# Altium PCB PCB1.PcbDoc
Units mm, origin at the board's own origin, x right, y up, seen from the top; angles counter-clockwise.
Board outline 150 x 130 mm, 2 copper layers (Top Layer, Bottom Layer); 49 components, 51 nets, 208 pads, 22 vias.
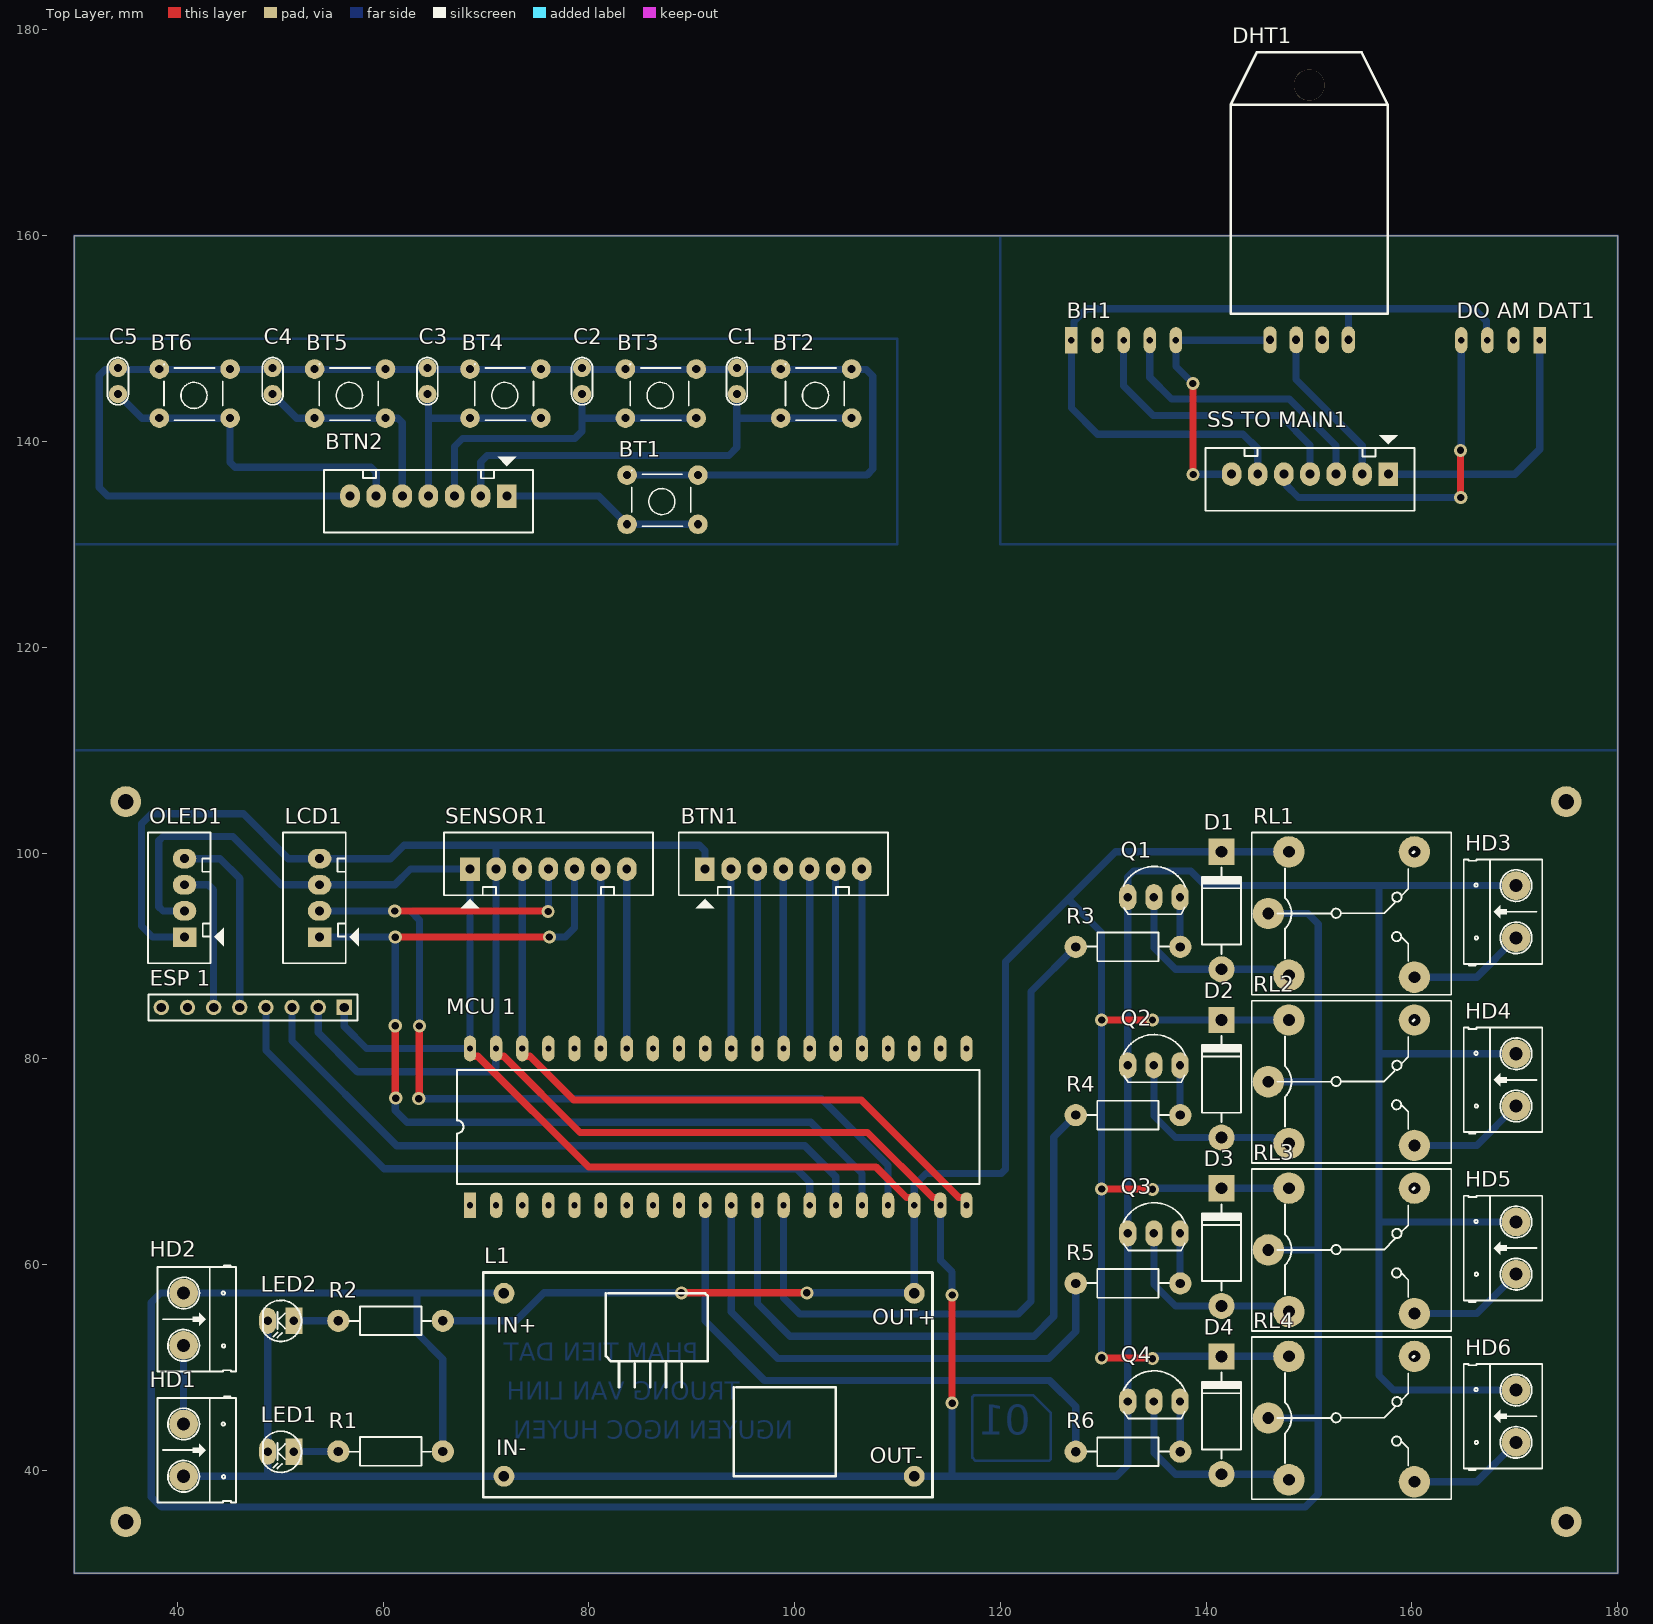
[diagram p0: Top Layer view]
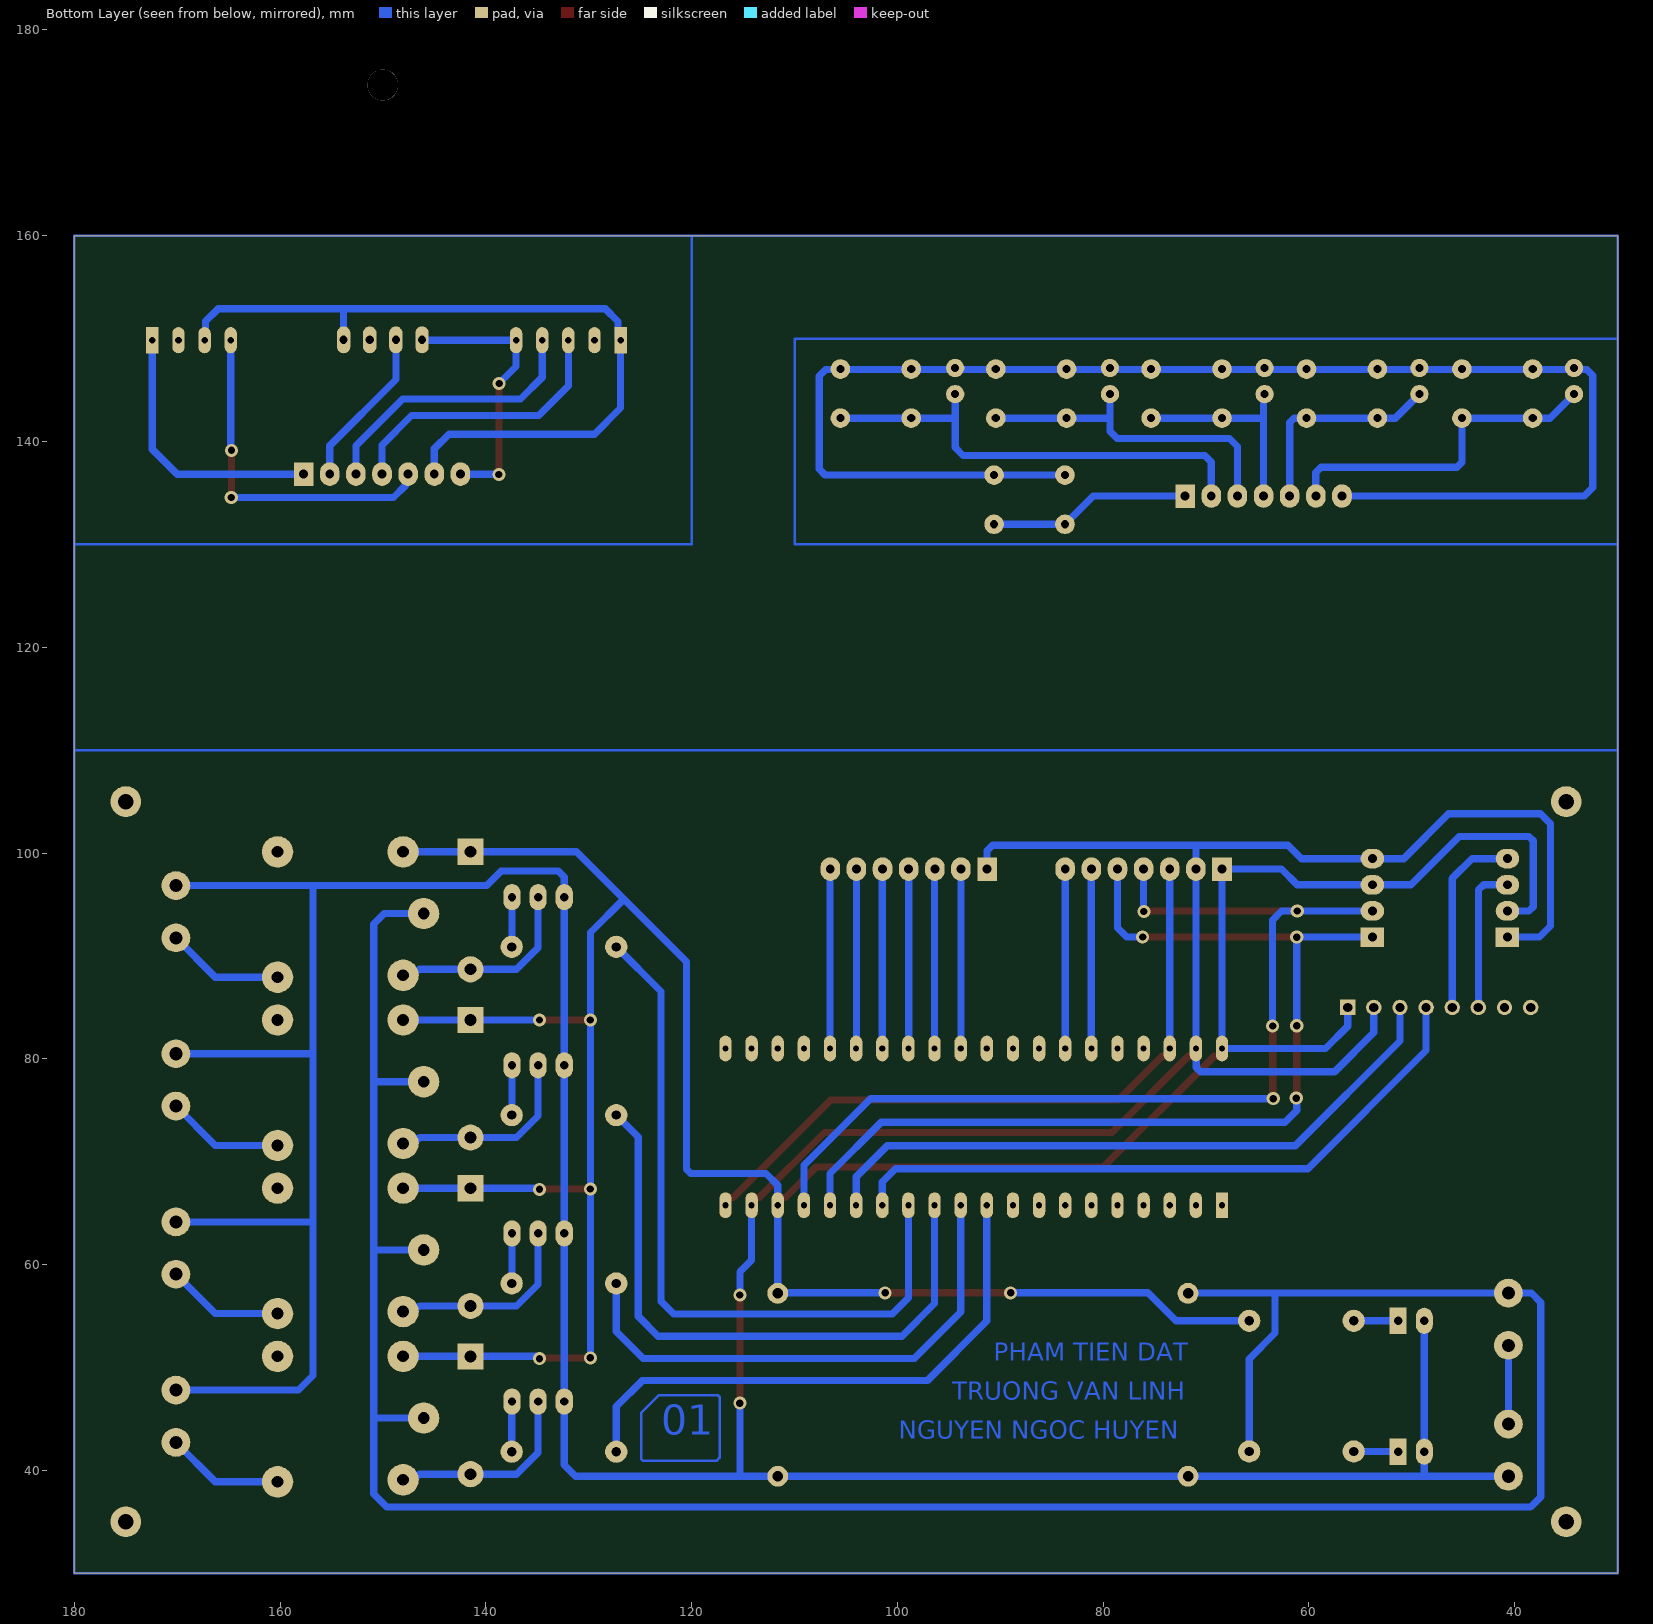
[diagram p1: Bottom Layer view, seen from below]
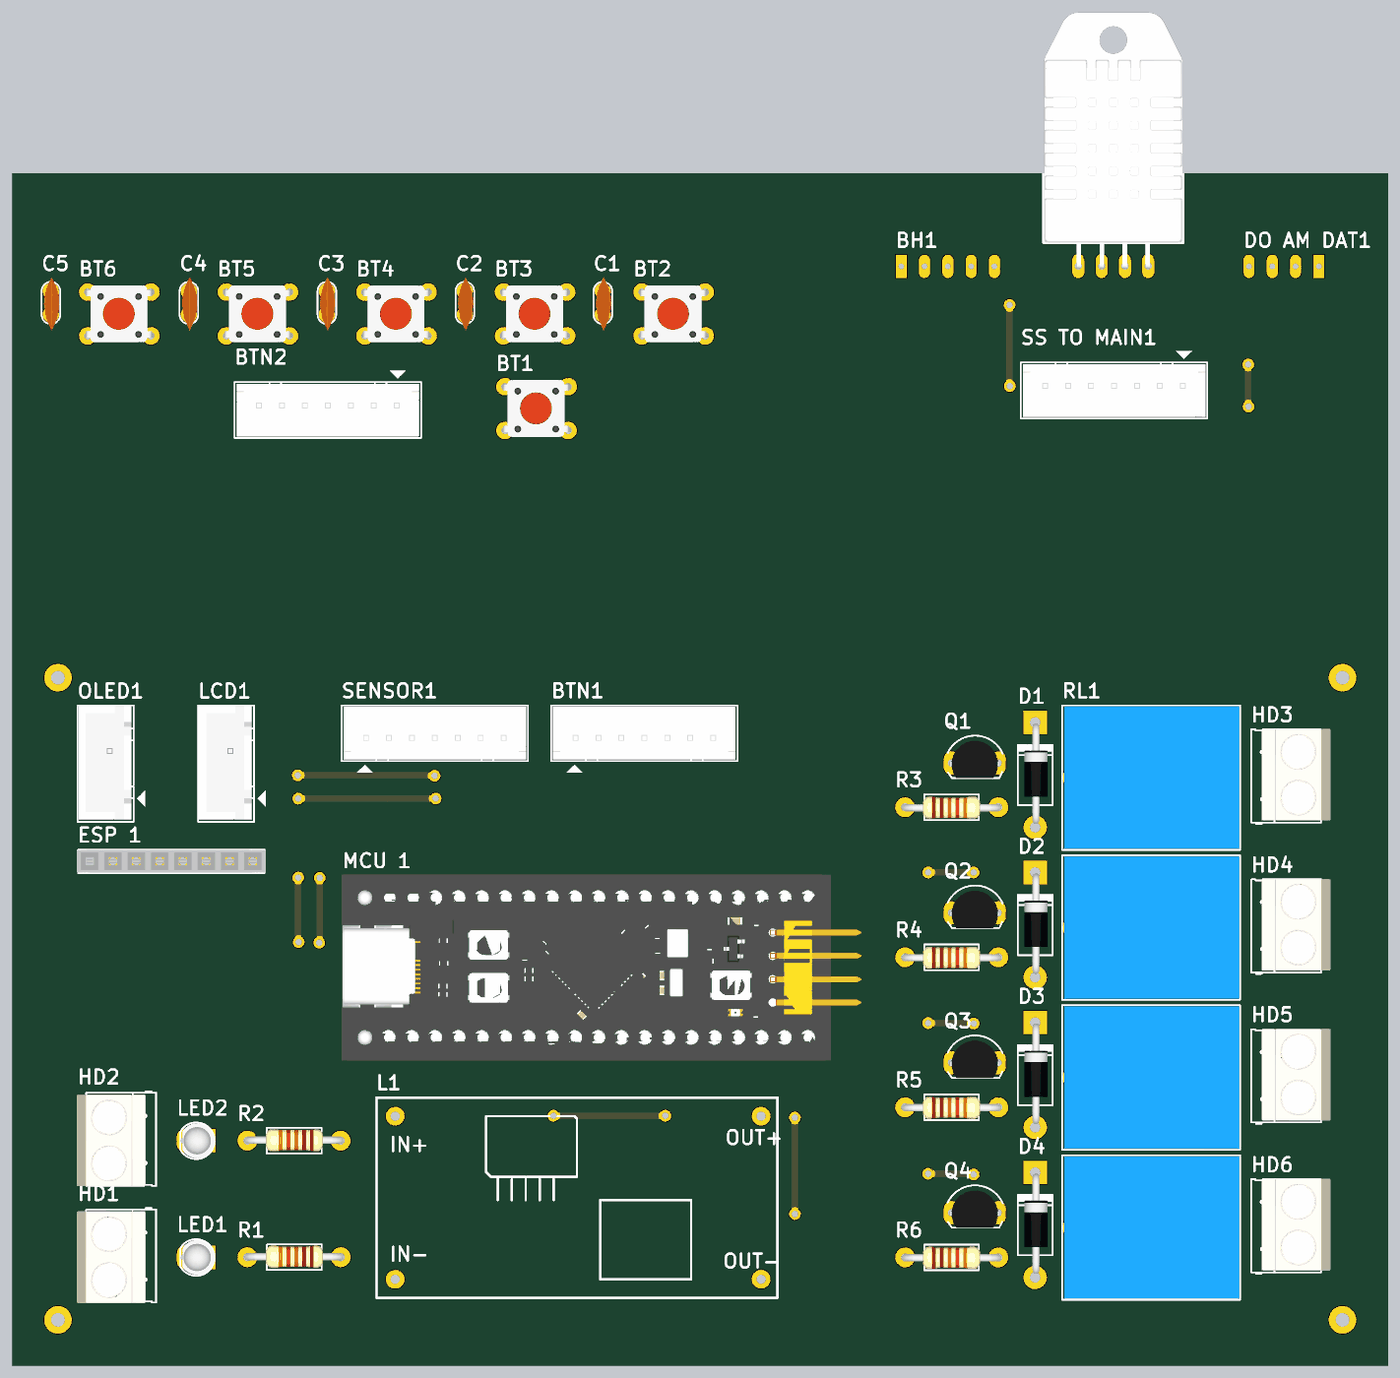
[diagram p2: 3D render of the assembled board from above, using the file's embedded part models]

## Layer stack, top to bottom
Top Solder: solder mask 0.0102, Solder Resist, Dk 3.5
Top Layer: signal copper 0.0356
Dielectric 1: dielectric 0.32, FR-4, Dk 4.8
Bottom Layer: signal copper 0.0356
Bottom Solder: solder mask 0.0102, Solder Resist, Dk 3.5

## Board outline
30,30 30,160 180,160 180,30

## Design rules (kind name [scope] priority, off if disabled: settings)
Clearance [All] p1: gap=0.3 ignorepadtopadclearanceinfootprint=FALSE
PolygonConnect [All] p1: connectstyle=Relief reliefconductorwidth=0.254 reliefentries=4 polygonreliefangle="90 Angle" airgapwidth=0.254
RoutingVias [All] p1: holewidth=0.711 width=1.27 viastyle="Through Hole" minholewidth=0.711 minwidth=1.27 maxholewidth=0.711 maxwidth=1.27
SolderMaskExpansion [All] p1: expansion=0.102 istentingtop=FALSE
Width [All] p1: maxlimit=0.7 minlimit=0.5 preferedwidth=0.7
30 further rules are at their usual default settings.

## Classes and differential pairs
component class Sheet1: BTN1 D1 D2 D3 D4 "ESP 1" HD1 HD2 HD3 HD4 HD5 HD6 L1 LCD1 LED1 LED2 "MCU 1" OLED1 Q1 Q2 Q3 Q4 R5 R6 RL1 RL2 RL3 RL4 SENSOR1

## Components (designator, comment, footprint, x,y, rotation, side; value= is the part's Value field where it differs from the comment)
BH1 "BH1750" BH1750 126.906,149.842 r90 top
BT1 "BT" SW4 90.272,131.75 r180 top
BT2 "BT" SW4 105.212,142.062 r180 top
BT3 "BT" SW4 90.111,142.062 r180 top
BT4 "BT" SW4 75.009,142.062 r180 top
BT5 "BT" SW4 59.907,142.062 r180 top
BT6 "BT" SW4 44.806,142.062 r180 top
BTN1 "JP7" CON7 91.288,98.436 r0 top value="Connector 7"
BTN2 "JP7" CON7 72.034,134.696 r180 top value="Connector 7"
C1 "CAP gom" CN1 94.386,147.142 r270 top
C2 "CAP gom" CN1 79.348,147.142 r270 top
C3 "CAP gom" CN1 64.31,147.142 r270 top
C4 "CAP gom" CN1 49.272,147.142 r270 top
C5 "CAP gom" CN1 34.234,147.142 r270 top
D1 "1N4007" D2A 141.503,100.127 r270 top
D2 "1N4007" D2A 141.503,83.769 r270 top
D3 "1N4007" D2A 141.503,67.412 r270 top
D4 "1N4007" D2A 141.503,51.054 r270 top
DHT1 "DHT22" DHT22 150.02,149.88 r0 top
"DO AM DAT1" "Cam_bien_do_am_dat" "Am dat" 172.423,149.842 r270 top
"ESP 1" "JP8" HDR1X8 56.236,84.988 r180 top value="Connector 8"
HD1 "Header 2" HED2 40.617,44.501 r270 top
HD2 "Header 2" HED2 40.617,57.226 r270 top
HD3 "Header 2" HED2 170.129,91.754 r90 top
HD4 "Header 2" HED2 170.129,75.408 r90 top
HD5 "Header 2" HED2 170.129,59.062 r90 top
HD6 "Header 2" HED2 170.129,42.715 r90 top
L1 "BUCK_LM2596" BUCK_LM2596 91.313,49.073 r0 top
LCD1 "JP4" CON4 53.833,91.832 r90 top value="Connector 4"
LED1 "LED" LED-3 51.333,41.808 r180 top value="LED 3 ly Single Colour"
LED2 "LED" LED-3 51.333,54.534 r180 top value="LED 3 ly Single Colour"
"MCU 1" "KIT STM32F401" "KIT STM32F401" 68.453,65.761 r90 top
OLED1 "JP4" CON4 40.705,91.832 r90 top value="Connector 4"
Q1 "C1815" QTO-92 134.925,95.707 r0 top
Q2 "C1815" QTO-92 134.925,79.367 r0 top
Q3 "C1815" QTO-92 134.925,63.026 r0 top
Q4 "C1815" QTO-92 134.925,46.685 r0 top
R1 "1k" R1/2W 55.651,41.834 r0 top value="R1/4W - 1K"
R2 "1k" R1/2W 55.651,54.534 r0 top value="R1/4W - 1K"
R3 "1k" R1/2W 137.49,90.881 r180 top value="R1/4W - 1K"
R4 "1k" R1/2W 137.49,74.524 r180 top value="R1/4W - 1K"
R5 "1k" R1/2W 137.49,58.166 r180 top value="R1/4W - 1K"
R6 "1k" R1/2W 137.49,41.808 r180 top value="R1/4W - 1K"
RL1 "Relay" RL_SPDT_10A 146.049,94.118 r0 top value="Relay SPDT, 10A, 12V"
RL2 "Relay" RL_SPDT_10A 146.049,77.772 r0 top value="Relay SPDT, 10A, 12V"
RL3 "Relay" RL_SPDT_10A 146.049,61.426 r0 top value="Relay SPDT, 10A, 12V"
RL4 "Relay" RL_SPDT_10A 146.049,45.079 r0 top value="Relay SPDT, 10A, 12V"
SENSOR1 "JP7" CON7 68.453,98.436 r0 top value="Connector 7"
"SS TO MAIN1" "" CON7 157.716,136.825 r180 top value="Connector 7"

## Footprints (in the part's own frame and the unit in brackets; to place one, negate y for a bottom-side part, rotate by r counter-clockwise, add the part's x,y. Pads: shape width x height; smd on the part's side, far side on the other; paste and mask are expansions set on the pad)
"Am dat" [mm]
  rect 2.54x1.2 hole 0.64: 1(0,0)
  oval 2.54x1.2 hole 0.64: 2(0,-2.54) 3(0,-5.08) 4(0,-7.62)
BH1750 [mm]
  rect 2.54x1.2 hole 0.64: 1(0,0)
  oval 2.54x1.2 hole 0.64: 2(0,-2.54) 3(0,-5.08) 4(0,-7.62) 5(0,-10.16)
BUCK_LM2596 [mil]
  round 80 hole 40: 1(-770,320) 2(-770,-380) 3(800,-380) 4(800,320)
  silkscreen extent -850,-460 870,400
CN1 [mil]
  round 70 hole 31: 1(0,0) 2(100,0)
  silkscreen extent -40,-40 141,40, body extent -60,-30 170,37, height 265
CON4 [mil]
  rect 75x90 hole 34: 1(0,0)
  oval 75x90 hole 34: 2(100,0) 3(200,0) 4(300,0)
  silkscreen extent -100,-150 400,140, body extent -90,-90 398,136, height 276
CON7 [mil] "CON7"
  rect 75x90 hole 34: 1(0,0)
  oval 75x90 hole 34: 2(100,0) 3(200,0) 4(300,0) 5(400,0) 6(500,0) 7(600,0)
  silkscreen extent -100,-150 700,140, body extent -92,-92 692,134, height 276
D2A [mil] "Diode 2A, W 150mil, L 450mil"
  round 100 hole 45: 1(450,0)
  rect 100x100 hole 45: 2(0,0)
  silkscreen extent 61,-75 391,75, body extent 5,-47 435,54, height 100
DHT22 [mm]
  oval 1.308x2.616 hole 0.8: DATA(-1.27,0) GND(3.81,0) NC(1.27,0) VDD(-3.81,0)
  round 3 hole 3 unplated: ""(0,24.765)
  silkscreen extent -7.62,2.54 7.62,27.94, body extent -7.55,-0.25 7.55,27.64, height 7.7
HDR1X8 [mm] "Connector; Header; 8 Position"
  rect 1.5x1.5 hole 0.9: 1(0,0)
  round 1.5 hole 0.9: 2(2.54,0) 3(5.08,0) 4(7.62,0) 5(10.16,0) 6(12.7,0) 7(15.24,0) 8(17.78,0)
  silkscreen extent -1.27,-1.27 19.05,1.27, body extent -1.4,-1.26 19.18,1.24, height 7.92
HED2 [mil] "Header 2, 2 pin, hight 300mil, Pin to Pin 200, Colour Green"
  round 110 hole 50: 1(0,0) 2(200,0)
  silkscreen extent -106,-100 300,200, body extent -92,-140 302,155, height 394
"KIT STM32F401" [mm]
  rect 2.5x1.2 hole 0.6: 1(0,0)
  oval 2.5x1.2 hole 0.6: 2(0,-2.54) 3(0,-5.08) 4(0,-7.62) 5(0,-10.16) 6(0,-12.7) 7(0,-15.24) 8(0,-17.78) 9(0,-20.32) 10(0,-22.86) 11(0,-25.4) 12(0,-27.94) 13(0,-30.48) 14(0,-33.02) 15(0,-35.56) 16(0,-38.1) 17(0,-40.64) 18(0,-43.18) 19(0,-45.72) 20(0,-48.26) 21(15.24,-48.26) 22(15.24,-45.72) 23(15.24,-43.18) 24(15.24,-40.64) 25(15.24,-38.1) 26(15.24,-35.56) 27(15.24,-33.02) 28(15.24,-30.48) 29(15.24,-27.94) 30(15.24,-25.4) 31(15.24,-22.86) 32(15.24,-20.32) 33(15.24,-17.78) 34(15.24,-15.24) 35(15.24,-12.7) 36(15.24,-10.16) 37(15.24,-7.62) 38(15.24,-5.08) 39(15.24,-2.54) 40(15.24,0)
  silkscreen extent 2.08,-49.53 13.16,1.27, body extent -2.51,-54.1 17.81,2.54, height 7.73
LED-3 [mil] "LED 2 PIN, 3ly Only colour"
  rect 65x100 hole 32: 1(0,0)
  oval 65x100 hole 32: 2(100,0)
  silkscreen extent -29,-78 118,79, body extent -29,-75 109,75, height 256
QTO-92 [mil] "TO-92"
  oval 66x100 hole 32: 1(-100,0) 2(0,0) 3(100,0)
  silkscreen extent -117,-65 120,118, body extent -109,-66 109,95, height 245
R1/2W [mil] "R 1/2W, 2 pin, 300mil"
  round 85 hole 35: 1(0,0) 2(400,0)
  silkscreen extent 42,-55 356,55, body extent -12,-45 414,49, height 91
RL_SPDT_10A [mil] "Relay SPDT, 5 pin, 10A,W 650mil, L 800mil, H 800mil"
  round 120 hole 45: 1(0,0) 2(559.06,236.22) 3(559.06,-243.78) 4(78.74,-236.22) 5(78.74,236.22)
  silkscreen extent -63,-311 700,310, body extent -55,-306 697,304, height 602
SW4 [mil] "SW button 4pin, 250 x250 mil"
  round 75 hole 31: 1(-13,-8) 1(258,-8) 2(-13,-196) 2(258,-196)
  silkscreen extent 15,-215 240,0, body extent -31,-225 281,19, height 276

## Part data
BT1 BT2 BT3 BT4 BT5 BT6: library part BUTTON
BTN1 BTN2 SENSOR1 "SS TO MAIN1": library part Con7, "Connector 7"
D1 D2 D3 D4: library part D1A, "Diode 1A"
DHT1: "Capacitive-type humidity and temperature module/sensor", Package=Package, Check_prices=https://www.snapeda.com/parts/DHT22/Aosong+Electronics/view-part/?ref=eda, MF="Aosong Electronics", MP=DHT22, SnapEDA_Link=https://www.snapeda.com/parts/DHT22/Aosong+Electronics/view-part/?ref=snap
"ESP 1": library part "jam 8", "jam 8"
HD1 HD2 HD3 HD4 HD5 HD6: library part Hed2, "Header 2 (Green)"
LCD1 OLED1: library part Con4, "Connector 4"
LED1 LED2: "LED Single colour Green and Red"
Q1 Q2 Q3 Q4: "NPN 600mW, ECB"
R1 R2 R3 R4 R5 R6: library part R1/4W, "Resistor 1/4W"
RL1 RL2 RL3 RL4: library part "Relay SRD", "Relay SPDT 5 Pin"

## Free pads (board coordinates)
  round 3 hole 1.5: 2(35,35) 2(35,105) 2(175,35) 2(175,105)

## Via types
v1: diameter 1.27, hole 0.711, Top Layer to Bottom Layer, 22 vias

## Nets (pads, with @x,y where several pads share a name; then routed paths per layer and width w, separated by ;. In a path a pad name is that pad's centre, name@x,y a point inside that pad or via, vN(x,y) a via of type N, cw(c..) or ccw(c..) an arc to the next point about the centre after c; other vN are vias at no path point)
1: BT2.1 BTN2.2 C1.2 | length 45.2
  Bottom Layer w0.7: BTN2.2 69.494,137.998 70.137,138.641 93.624,138.641 94.386,139.403 94.386,142.363 ; C1.2 94.386,142.363 ; BT2.1@105.543,142.265 98.659,142.265 94.484,142.265 94.386,142.363
2: BT3.1 BTN2.3 C2.2 | length 32.6
  Bottom Layer w0.7: BTN2.3 66.954,139.522 67.716,140.284 78.638,140.284 79.348,140.994 79.348,142.368 ; C2.2 79.348,142.368 ; BT3.1@90.441,142.265 79.451,142.265 79.348,142.368
3: BT4.1 BTN2.4 C3.2 | length 20.8
  Bottom Layer w0.7: BTN2.4 64.414,142.265 ; C3.2@64.414,144.602 64.414,142.265 ; BT4.1@75.339,142.265 64.414,142.265
4: BT5.1 BTN2.5 C4.2 | length 20.9
  Bottom Layer w0.7: C4.2 51.609,142.265 53.354,142.265 60.238,142.265 61.464,142.265 61.874,141.855 BTN2.5
5: BT6.1 BTN2.6 C5.2 | length 33.1
  Bottom Layer w0.7: C5.2 36.57,142.265 38.252,142.265 45.136,142.265 45.136,137.973 45.618,137.49 58.826,137.49 59.334,136.982 BTN2.6
+3.3: "MCU 1.20" "MCU 1.38" SENSOR1.3 | length 67.5
  Top Layer w0.7: 73.533,81.001 73.533,80.486 73.764,80.255 74.279,80.255 78.537,75.997 106.477,75.997 115.967,66.506 116.482,66.506 116.713,66.275 116.713,65.761
  Bottom Layer w0.7: 73.533,81.001 SENSOR1.3
"+3.3 SS": "DO AM DAT1.4" "SS TO MAIN1.5" | length 33.9
  Top Layer w0.7: v1(164.727,139.136) 164.727,134.59 v1(164.752,134.564)
  Bottom Layer w0.7: 147.556,136.825 147.787,136.594 147.787,135.756 148.979,134.564 v1(164.752,134.564) ; v1(164.727,139.136) 164.803,139.212 164.803,149.842
+5: "ESP 1.1" "MCU 1.18" "MCU 1.40" D1.2 D2.2 D3.2 D4.2 L1.4 LCD1.3 OLED1.2 R2.2 RL1.5 RL2.5 RL3.5 RL4.5 SENSOR1.1 | length 344.5
  Top Layer w0.7: 68.453,81.001 68.453,80.486 68.684,80.255 69.199,80.255 79.959,69.494 107.899,69.494 110.887,66.506 111.402,66.506 111.633,66.275 111.633,65.761 ; v1(89.002,57.252) v1(101.194,57.252) ; v1(129.845,50.927) 134.722,50.927 v1(134.798,50.851) ; v1(129.845,67.348) 134.76,67.348 v1(134.798,67.31) ; v1(129.845,83.769) v1(134.798,83.769)
  Bottom Layer w0.7: OLED1.2 38.612,94.372 38.202,94.782 38.202,101.19 38.612,101.6 45.39,101.6 50.078,96.912 LCD1.3 61.149,96.912 62.673,98.436 SENSOR1.1 68.453,81.001 58.395,81.001 56.236,83.16 56.236,84.988 ; R2.2 72.923,54.534 75.641,57.252 v1(89.002,57.252) ; v1(101.194,57.252) 111.582,57.252 L1.4 111.633,67.716 112.776,68.859 120.088,68.859 120.498,69.269 120.498,89.433 126.53,95.466 ; v1(129.845,50.927) v1(129.845,67.348) v1(129.845,83.769) 129.845,92.278 126.657,95.466 126.53,95.466 ; v1(134.798,50.851) 134.952,50.851 135.181,51.079 RL4.5 ; v1(134.798,67.31) 134.952,67.31 135.068,67.426 RL3.5 ; v1(134.798,83.769) D2.2 148.046,83.769 RL2.5 ; RL1.5 148.04,100.127 D1.2 131.191,100.127 126.53,95.466
+12: HD2.1 L1.1 R1.2 RL1.1 RL2.1 RL3.1 RL4.1 | length 259.6
  Bottom Layer w0.7: R1.2 65.811,50.825 63.297,53.34 63.297,57.226 ; L1.1 71.73,57.226 63.297,57.226 ; RL4.1 150.82,45.079 150.901,45.161 150.901,61.426 ; RL3.1 150.901,61.426 ; RL2.1 150.828,77.772 150.901,77.699 ; RL1.1 149.874,94.118 150.901,93.091 150.901,77.699 ; 150.901,45.079 150.901,37.694 149.631,36.424 38.456,36.424 37.465,37.414 37.465,56.312 38.379,57.226 HD2.1 63.297,57.226 ; 150.901,61.426 150.901,77.699
ADC: "MCU 1.34" SENSOR1.7 | length 17.4
  Bottom Layer w0.7: 83.693,81.001 SENSOR1.7
"ADC SS": "DO AM DAT1.1" "SS TO MAIN1.1" | length 26.3
  Bottom Layer w0.7: 157.716,136.825 170.01,136.825 172.423,139.238 172.423,149.842
BTN1: "MCU 1.26" BTN1.6 | length 17.4
  Bottom Layer w0.7: BTN1.6 103.988,81.026 104.013,81.001
BTN2: "MCU 1.27" BTN1.5 | length 17.4
  Bottom Layer w0.7: BTN1.5 101.473,98.411 101.473,81.001
BTN3: "MCU 1.28" BTN1.4 | length 17.4
  Bottom Layer w0.7: BTN1.4 98.908,81.026 98.933,81.001
BTN4: "MCU 1.29" BTN1.3 | length 17.4
  Bottom Layer w0.7: BTN1.3 96.393,98.411 96.393,81.001
BTN5: "MCU 1.30" BTN1.2 | length 17.4
  Bottom Layer w0.7: BTN1.2 93.828,81.026 93.853,81.001
"DC IN": HD1.1 HD2.2 | length 7.6
  Bottom Layer w0.7: HD1.1 HD2.2
DHT: "MCU 1.35" SENSOR1.6 | length 17.4
  Bottom Layer w0.7: 81.153,81.001 SENSOR1.6
"DHT SS": "SS TO MAIN1.2" DHT1.DATA | length 15.7
  Bottom Layer w0.7: DHT1.DATA 148.75,146.02 155.176,139.593 155.176,136.825
G: BT1.2 BT2.2 BT3.2 BT4.2 BT5.2 BT6.2 BTN2.7 C1.1 C2.1 C3.1 C4.1 C5.1 | length 144.5
  Bottom Layer w0.7: BTN2.7 33.25,134.696 32.41,135.536 32.41,146.408 32.996,146.993 106.964,146.993 107.594,146.363 107.594,137.314 107.009,136.728 90.602,136.728 BT1.2@83.718,136.728
GND: "ESP 1.2" "MCU 1.19" "MCU 1.39" BTN1.1 HD1.2 HD3.2 HD4.2 HD5.2 HD6.2 L1.2 L1.3 LCD1.4 LED1.2 LED2.2 OLED1.1 Q1.1 Q2.1 Q3.1 Q4.1 SENSOR1.2 | length 485.1
  Top Layer w0.7: 70.993,81.001 70.993,80.486 71.224,80.255 71.739,80.255 79.146,72.847 107.086,72.847 113.427,66.506 113.942,66.506 114.173,66.275 114.173,65.761 ; v1(115.316,46.533) v1(115.316,57.048)
  Bottom Layer w0.7: HD1.2 48.768,39.421 ; OLED1.1 37.592,91.832 36.525,92.899 36.525,102.845 37.49,103.81 46.431,103.81 50.789,99.452 LCD1.4 60.717,99.452 62.027,100.762 70.968,100.762 ; LED2.2 LED1.2 48.793,39.446 48.768,39.421 ; 53.696,84.988 53.696,82.55 57.506,78.74 70.545,78.74 70.955,79.15 70.955,80.962 70.993,81.001 70.968,81.026 70.968,100.762 ; BTN1.1 91.288,100.228 90.754,100.762 70.968,100.762 ; 114.173,65.761 114.173,60.427 115.316,59.284 v1(115.316,57.048) ; v1(115.316,46.533) 115.316,39.421 ; 157.08,64.142 HD5.2 ; HD6.2 158.224,47.795 156.794,49.225 156.794,80.594 ; HD4.2 156.901,80.488 156.794,80.594 ; HD3.2 156.794,96.834 ; 48.768,39.421 L1.2 L1.3 115.316,39.421 ; 115.316,39.421 131.293,39.421 132.385,40.513 Q4.1 Q3.1 Q2.1 Q1.1 132.385,97.661 132.971,98.247 138.506,98.247 139.919,96.834 156.794,96.834 ; 156.794,80.594 156.794,96.834
"GND SS": "DO AM DAT1.3" "SS TO MAIN1.6" BH1.1 DHT1.GND | length 76.7
  Bottom Layer w0.7: 145.016,136.825 145.016,139.289 143.594,140.711 129.446,140.711 126.906,143.251 BH1.1 127.156,150.092 127.156,151.654 128.405,152.903 153.83,152.903 ; DHT1.GND 153.83,152.903 ; 167.343,149.842 167.247,149.938 167.247,151.678 166.022,152.903 153.83,152.903
NetD1_1: D1.1 Q1.2 RL1.4 | length 19.1
  Bottom Layer w0.7: Q1.2 134.925,90.789 137.017,88.697 D1.1 146.465,88.697 146.594,88.567 147.599,88.567 RL1.4
NetD2_1: D2.1 Q2.2 RL2.4 | length 19.2
  Bottom Layer w0.7: Q2.2 134.925,74.431 137.017,72.339 D2.1 146.465,72.339 146.583,72.221 147.599,72.221 RL2.4
NetD3_1: D3.1 Q3.2 RL3.4 | length 19.2
  Bottom Layer w0.7: Q3.2 134.925,58.073 137.017,55.982 D3.1 146.465,55.982 146.571,55.875 147.599,55.875 RL3.4
NetD4_1: D4.1 Q4.2 RL4.4 | length 19.2
  Bottom Layer w0.7: Q4.2 134.925,41.716 137.017,39.624 D4.1 146.465,39.624 146.56,39.529 147.599,39.529 RL4.4
NetHD3_1: HD3.1 RL1.3 | length 11.5
  Bottom Layer w0.7: RL1.3 166.301,87.926 HD3.1
NetHD4_1: HD4.1 RL2.3 | length 11.5
  Bottom Layer w0.7: RL2.3 166.301,71.58 HD4.1
NetHD5_1: HD5.1 RL3.3 | length 11.5
  Bottom Layer w0.7: RL3.3 166.301,55.234 HD5.1
NetHD6_1: HD6.1 RL4.3 | length 11.5
  Bottom Layer w0.7: RL4.3 166.301,38.887 HD6.1
NetLED1_1: LED1.1 R1.1 | length 4.3
  Bottom Layer w0.7: LED1.1 51.359,41.834 R1.1
NetLED2_1: LED2.1 R2.1 | length 4.3
  Bottom Layer w0.7: LED2.1 R2.1
NetQ1_3: Q1.3 R3.1 | length 4.8
  Bottom Layer w0.7: Q1.3 137.465,90.907 R3.1
NetQ2_3: Q2.3 R4.1 | length 4.9
  Bottom Layer w0.7: Q2.3 137.465,74.549 R4.1
NetQ3_3: Q3.3 R5.1 | length 4.9
  Bottom Layer w0.7: Q3.3 137.465,58.191 R5.1
NetQ4_3: Q4.3 R6.1 | length 4.9
  Bottom Layer w0.7: Q4.3 137.49,46.66 R6.1
R: BT1.1 BTN2.1 | length 19.7
  Bottom Layer w0.7: BTN2.1 80.975,134.696 83.718,131.953 BT1.1@90.602,131.953
RST: "MCU 1.25" BTN1.7 | length 17.4
  Bottom Layer w0.7: BTN1.7 106.553,98.411 106.553,81.001
RX: "ESP 1.3" "MCU 1.15" | length 64.3
  Bottom Layer w0.7: 51.156,84.988 51.156,81.737 61.341,71.552 100.99,71.552 104.013,68.529 104.013,65.761
SCL: "MCU 1.16" LCD1.1 SENSOR1.5 | length 98.7
  Top Layer w0.7: v1(61.189,83.21) 61.189,76.225 v1(61.239,76.175) ; v1(61.189,91.821) 61.2,91.832 v1(76.16,91.832)
  Bottom Layer w0.7: LCD1.1 61.178,91.832 v1(61.189,91.821) v1(61.189,83.21) ; v1(61.239,76.175) 61.189,76.124 61.189,74.981 62.332,73.838 101.575,73.838 106.553,68.859 106.553,65.761 ; v1(76.16,91.832) 77.713,91.832 78.613,92.732 SENSOR1.5
"SCL ESP": "ESP 1.6" OLED1.3 | length 14.4
  Bottom Layer w0.7: OLED1.3 43.017,96.912 43.536,96.393 43.536,84.988
"SCL SS": "SS TO MAIN1.3" BH1.4 | length 27.2
  Bottom Layer w0.7: BH1.4 134.526,146.248 136.634,144.14 148.09,144.14 152.636,139.593 152.636,136.825
SDA: "MCU 1.17" LCD1.2 SENSOR1.4 | length 98.7
  Top Layer w0.7: v1(61.138,94.361) 61.149,94.372 75.986,94.372 v1(76.048,94.31) ; v1(63.475,76.124) 63.525,76.175 v1(63.525,83.185)
  Bottom Layer w0.7: LCD1.2 61.127,94.372 v1(61.138,94.361) 62.662,94.361 63.551,93.472 63.551,83.21 v1(63.525,83.185) ; v1(63.475,76.124) 102.616,76.124 109.093,69.647 109.093,65.761 ; v1(76.048,94.31) 76.073,94.336 SENSOR1.4
"SDA ESP": "ESP 1.5" OLED1.4 | length 18.7
  Bottom Layer w0.7: OLED1.4 44.16,99.452 46.076,97.536 46.076,84.988
"SDA SS": "SS TO MAIN1.4" BH1.3 | length 27.8
  Bottom Layer w0.7: BH1.3 131.986,145.385 134.856,142.514 147.226,142.514 150.096,139.644 150.096,136.825
TB1: "MCU 1.13" R3.2 | length 70.5
  Bottom Layer w0.7: 98.933,65.761 98.933,56.769 100.508,55.194 121.742,55.194 122.987,56.439 122.987,86.538 R3.2
TB2: "MCU 1.12" R4.2 | length 60.9
  Bottom Layer w0.7: 96.393,65.761 96.393,56.21 99.568,53.035 123.266,53.035 125.197,54.966 125.197,72.39 R4.2
TB3: "MCU 1.11" R5.2 | length 51.5
  Bottom Layer w0.7: 93.853,65.761 93.853,55.397 98.374,50.876 124.714,50.876 127.33,53.492 R5.2
TB4: "MCU 1.10" R6.2 | length 55.1
  Bottom Layer w0.7: 91.313,65.761 91.313,54.508 97.104,48.717 124.816,48.717 127.33,46.203 R6.2
TX: "ESP 1.4" "MCU 1.14" | length 64.6
  Bottom Layer w0.7: 48.616,84.988 48.616,80.797 60.096,69.317 100.178,69.317 101.473,68.021 101.473,65.761
"VCC SS": "SS TO MAIN1.7" BH1.5 DHT1.VDD | length 26.6
  Top Layer w0.7: v1(138.717,145.639) 138.717,136.825 v1(138.743,136.799)
  Bottom Layer w0.7: v1(138.717,145.639) 137.066,147.29 BH1.5 146.172,149.842 DHT1.VDD ; v1(138.743,136.799) 138.768,136.825 142.476,136.825
pads on no net: "DO AM DAT1.2" "ESP 1.7" "ESP 1.8" "MCU 1.1" "MCU 1.2" "MCU 1.3" "MCU 1.4" "MCU 1.5" "MCU 1.6" "MCU 1.7" "MCU 1.8" "MCU 1.9" "MCU 1.21" "MCU 1.22" "MCU 1.23" "MCU 1.24" "MCU 1.31" "MCU 1.32" "MCU 1.33" "MCU 1.36" "MCU 1.37" BH1.2 DHT1. DHT1.NC RL1.2 RL2.2 RL3.2 RL4.2
copper on no net: | length 1426.7
  Bottom Layer w0.254: 30,30 180,30 ; 30,30 30,160 180,160 ; 30,30 30,110 180,110 180,30 ; 30,30 180,30 ; 180,30 180,160 ; 180,160 120,160 120,130 180,130 180,160 ; 30,130 110,130 110,150 30,150 30,130 ; 117.272,41.224 117.272,47.146 117.421,47.295 123.215,47.295 124.917,45.593 124.917,41.094 124.768,40.945 117.551,40.945 117.272,41.224

## Other copper
Bottom Layer:
  text "PHAM TIEN DAT" at 90.657,50.089 h3
  text "TRUONG VAN LINH" at 94.666,46.297 h3
  text "NGUYEN NGOC HUYEN" at 99.891,42.505 h3
  text "01" at 122.961,42.504 h5

## Text inside footprints (layer, text, board x,y; h text height)
L1: Top Overlay "IN+" at 70.993,53.391 h1.52; Top Overlay "IN-" at 70.993,41.453 h1.52; Top Overlay "OUT+" at 107.569,54.153 h1.52; Top Overlay "OUT-" at 107.315,40.691 h1.52